# Altium PCB PCB 14口3.81端子.pcbdoc
Units mm, origin at the board's own origin, x right, y up, seen from the top; angles counter-clockwise.
Board outline 118.36 x 61.52 mm, 2 copper layers (Top Layer, Bottom Layer); 10 components, 20 nets, 34 pads, 0 vias.
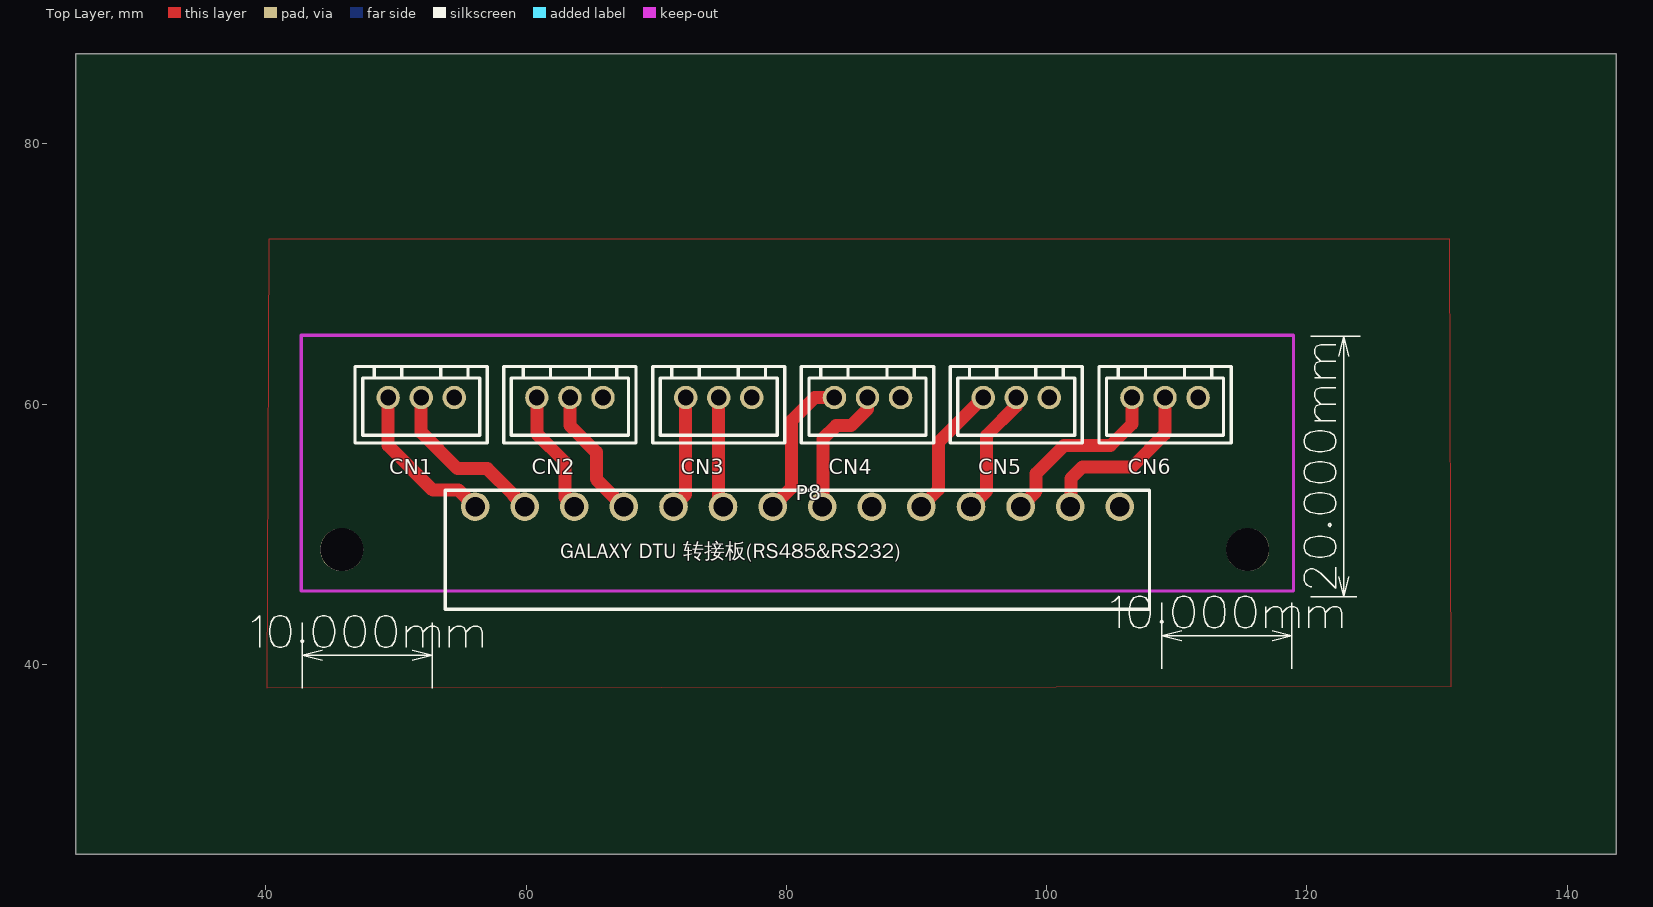
[diagram p0: Top Layer view]
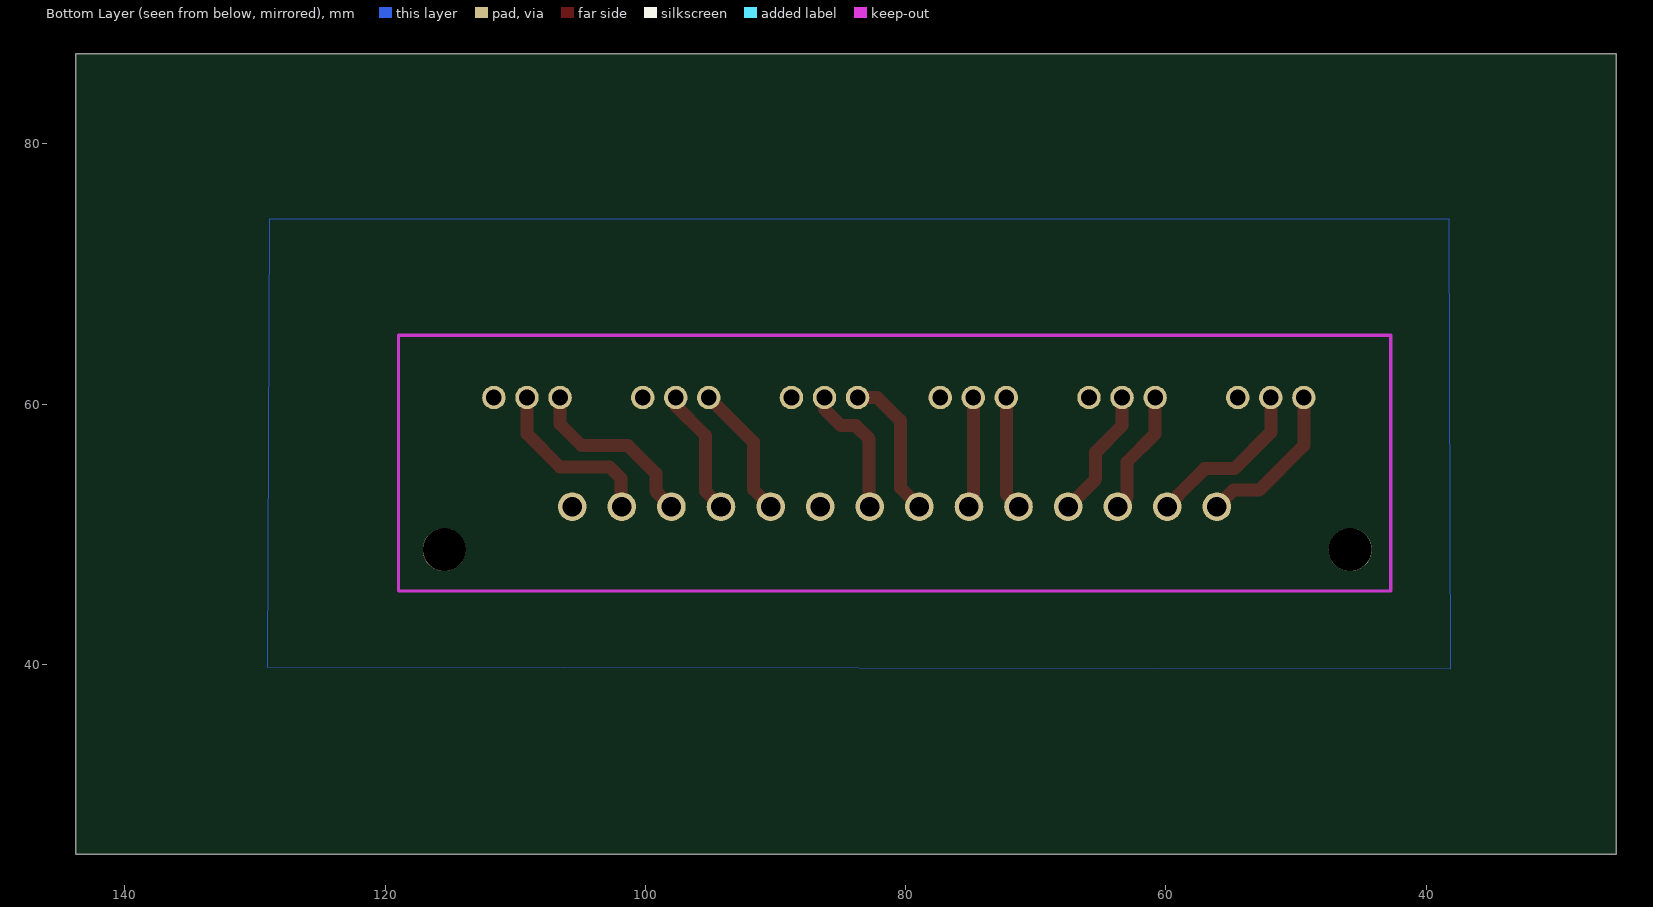
[diagram p1: Bottom Layer view, seen from below]

## Layer stack, top to bottom
Top Layer: signal copper (thickness not stored)
Dielectric: dielectric 0.32, FR-4, Dk 4.8
Bottom Layer: signal copper (thickness not stored)

## Board outline
143.764,25.4 25.4,25.4 25.4,86.919 143.764,86.919

## Components (designator, comment, footprint, x,y, rotation, side; value= is the part's Value field where it differs from the comment)
CN1 "A2501WV-3P" A2501WV-3P 51.943,60.503 r180 top
CN2 "A2501WV-3P" A2501WV-3P 63.373,60.503 r180 top
CN3 "A2501WV-3P" A2501WV-3P 74.803,60.503 r180 top
CN4 "A2501WV-3P" A2501WV-3P 86.233,60.503 r180 top
CN5 "A2501WV-3P" A2501WV-3P 97.663,60.503 r180 top
CN6 "A2501WV-3P" A2501WV-3P 109.093,60.503 r180 top
P8 "WJ15EDGRC-3.81-14P" WJ15EDGRC-3.81-14P 80.851,52.121 r0 top
? "" ? 121.932,55.202 r0 top
? "" ? 47.799,40.938 r0 top
? "" ? 113.839,42.462 r0 top

## Footprints (in the part's own frame and the unit in brackets; to place one, negate y for a bottom-side part, rotate by r counter-clockwise, add the part's x,y. Pads: shape width x height; smd on the part's side, far side on the other; paste and mask are expansions set on the pad)
A2501WV-3P [mm]
  round 1.8 hole 1.2: 1(2.54,0) 2(0,0) 3(-2.54,0)
  silkscreen extent -5.08,-2.38 5.08,3.5
WJ15EDGRC-3.81-14P [mm]
  round 2.2 hole 1.5: 1(-24.765,0) 2(-20.955,0) 3(-17.145,0) 4(-13.335,0) 5(-9.525,0) 6(-5.715,0) 7(-1.905,0) 8(1.905,0) 9(5.715,0) 10(9.525,0) 11(13.335,0) 12(17.145,0) 13(20.955,0) 14(24.765,0)
  silkscreen extent -27.05,-7.88 27.05,1.27
? [mm]
  silkscreen extent -2.15,-10 2.15,10

## Free pads (board coordinates)
  round 3.302 hole 3.302 unplated: ""(45.847,48.819) ""(115.443,48.819)

## Nets (pads, with @x,y where several pads share a name; then routed paths per layer and width w, separated by ;. In a path a pad name is that pad's centre, name@x,y a point inside that pad or via, vN(x,y) a via of type N, cw(c..) or ccw(c..) an arc to the next point about the centre after c; other vN are vias at no path point)
A1: CN1.1 P8.1 | length 12.3
  Top Layer w1: CN1.1 49.403,56.82 52.832,53.391 54.816,53.391 P8.1
A2: CN2.1 P8.3 | length 9.6
  Top Layer w1: CN2.1 60.833,57.709 62.992,55.55 62.992,52.835 P8.3
A3: CN3.1 P8.5 | length 8.8
  Top Layer w1: P8.5 72.263,53.058 CN3.1
A4: CN4.1 P8.7 | length 11.2
  Top Layer w1: P8.7 80.391,53.566 80.391,58.725 82.169,60.503 CN4.1
B1: CN1.2 P8.2 | length 13
  Top Layer w1: CN1.2 51.943,57.836 54.737,55.042 57.023,55.042 59.055,53.01 59.055,52.962 P8.2
B2: CN2.2 P8.4 | length 10.1
  Top Layer w1: CN2.2 63.373,58.344 65.405,56.312 65.405,54.232 P8.4
B3: CN3.2 P8.6 | length 8.5
  Top Layer w1: CN3.2 74.803,52.454 P8.6
B4: CN4.2 P8.8 | length 10.5
  Top Layer w1: P8.8 82.804,52.169 82.804,57.328 83.82,58.344 84.963,58.344 86.233,59.614 CN4.2
GND: CN1.3 CN2.3 CN3.3 CN4.3 CN5.3 CN6.3 P8.9 P8.14
R1: CN5.2 P8.11 | length 9.8
  Top Layer w1: P8.11 95.377,53.312 95.377,57.582 97.663,59.868 CN5.2
R2: CN6.2 P8.13 | length 13.6
  Top Layer w1: P8.13 101.854,52.169 101.854,54.28 102.743,55.169 106.553,55.169 109.093,57.709 CN6.2
S$18: 
S$20: 
S$24: 
S$26: 
S$28: 
S$30: 
S$5479: 
T1: CN5.1 P8.10 | length 10.3
  Top Layer w1: P8.10 91.694,53.439 91.694,57.074 CN5.1
T2: CN6.1 P8.12 | length 14
  Top Layer w1: P8.12 99.187,53.312 99.187,54.661 101.346,56.82 104.902,56.82 106.553,58.471 CN6.1

## Polygon pours and split planes (outlines as drawn)
GND on Bottom Layer (solid): 38.227,74.219 128.905,74.219 129.032,39.802 38.1,39.675 38.227,74.219
GND on Top Layer (solid): 40.259,72.695 130.937,72.695 131.064,38.278 40.132,38.151 40.259,72.695

## Silkscreen, mask and mechanical layers (free items; w line width, h text height)
Top Overlay:
  text "GALAXY DTU 转接板(RS485&RS232)" at 62.631,47.737 h2.03